# EAGLE board Motor-Board (EAGLE 7.3.0)
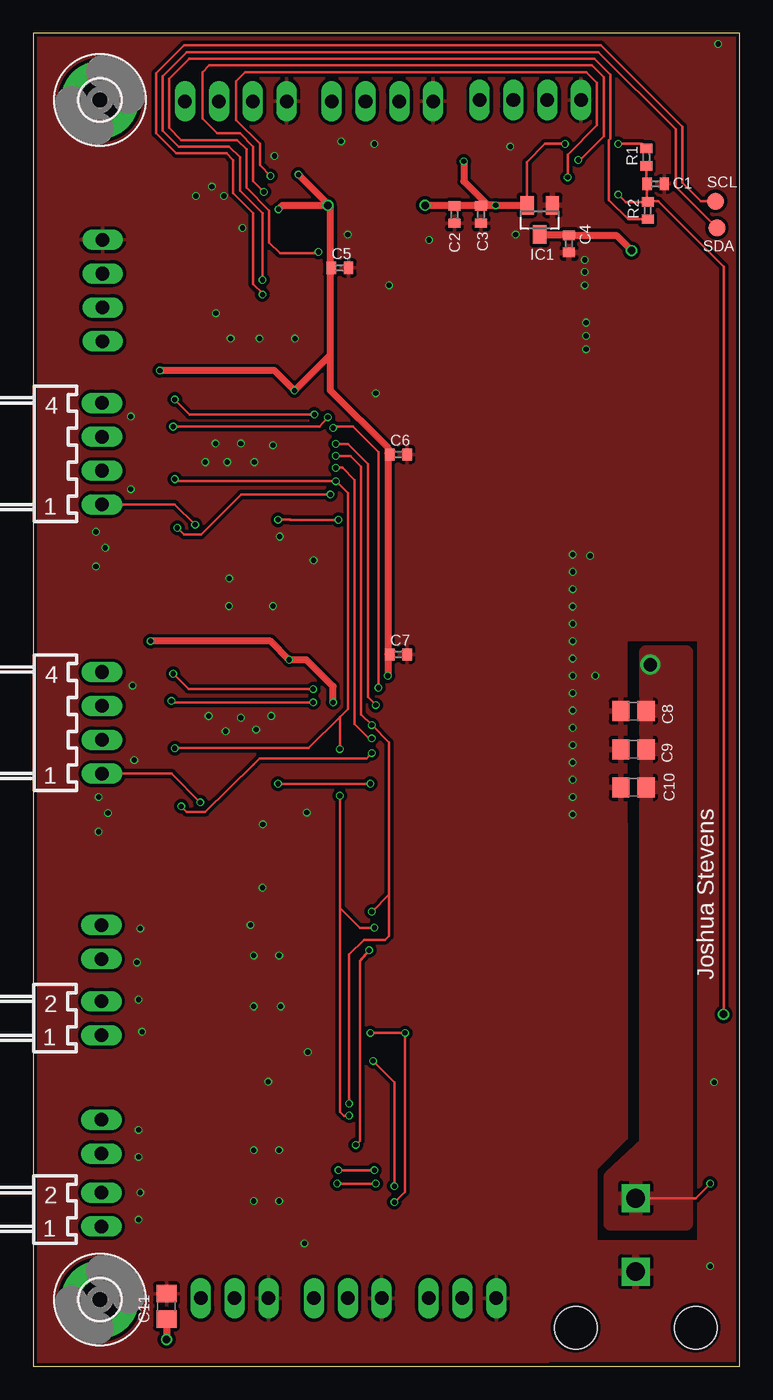
[diagram p0: board, top side]
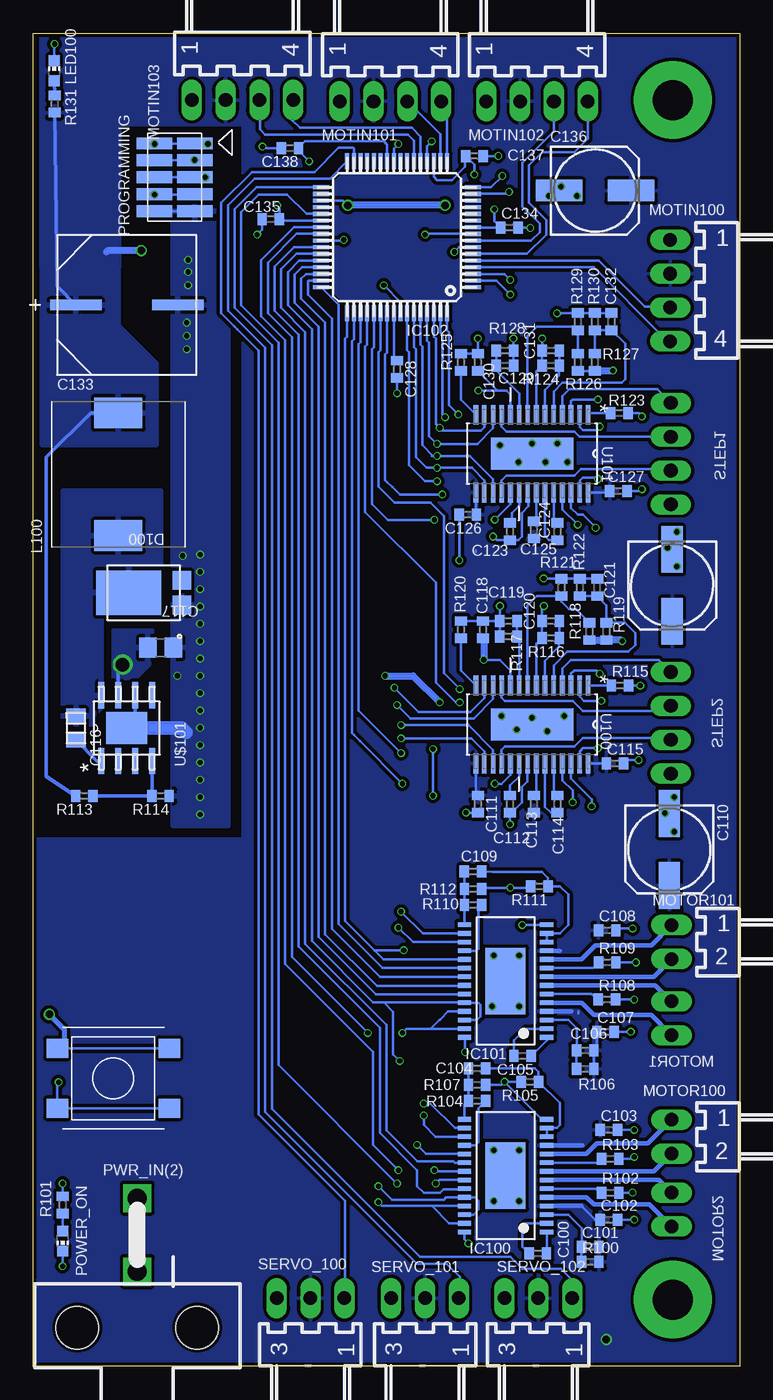
[diagram p1: board, bottom side, seen from below]

Size 53 x 100 mm. Coordinates in mm from the lower left corner, seen from the top.
Outline: 0,0 53,0 53,100 0,100 0,0
Copper layers (1*16): Top 0.035mm / dielectric 1.5mm / Bottom 0.035mm
Design rules "EagleRules-2-Layer-Shep": minimum track width 6mil, minimum drill 12mil, track to track 6mil, track to pad 6mil, pad to pad 6mil, via to via 6mil, smd to smd 0mil, copper to edge 10mil, drill to drill 10mil, minimum pad ring 2mil, minimum via ring 2mil, stop-mask expansion 2mil, vias tented up to drill 100mil, thermal gap 10mil
Net classes: 0 default: width 0.203 mm, drill 0.33 mm, clearance 0.254 mm; 1 +3v3: width 0.406 mm, drill 0.457 mm, clearance 0.254 mm; 2 VM: width 0.508 mm, drill 0.533 mm, clearance 0.254 mm

## Footprints (pad centres in the part's own frame; a part is rotated, then mirrored left to right if it is on the bottom)
C0402 = smd 0.7 x 0.9: 1 -0.65,0; 2 0.65,0
C0805 = smd 1.3 x 1.5: 1 -0.95,0; 2 0.95,0
153CLV-0605 = smd 3.5 x 1.6: + 2.7,0; - -2.7,0
0805 = smd 1.118 x 1.448: 1 -0.902,0; 2 0.902,0
SM_RADIAL_10AMM = smd 3.861 x 0.787: 1 -3.823,0; 2 3.823,0
POWERDI5 = smd 1.397 x 1.397: 1 -0.92,-2.857; 2 0.92,-2.857 | smd 3.353 x 4.851: 3 0,1.13
3,0-PAD = drill 3 pad 5.842: B3,0 0,0
SOT23 = smd 1 x 1.4: 1 -0.95,-1.1; 2 0.95,-1.1; 3 0,1.1
TSSOP-28 = smd 0.35 x 1: 1 -4.225,-3.087; 2 -3.575,-3.087; 3 -2.925,-3.087; 4 -2.275,-3.087; 5 -1.625,-3.087; 6 -0.975,-3.087; 7 -0.325,-3.087; 8 0.325,-3.087; 9 0.975,-3.087; 10 1.625,-3.087; 11 2.275,-3.087; 12 2.925,-3.087; 13 3.575,-3.087; 14 4.225,-3.087; 15 4.225,3.087; 16 3.575,3.087; 17 2.925,3.087; 18 2.275,3.087; 19 1.625,3.087; 20 0.975,3.087; 21 0.325,3.087; 22 -0.325,3.087; 23 -0.975,3.087; 24 -1.625,3.087; 25 -2.275,3.087; 26 -2.925,3.087; 27 -3.575,3.087; 28 -4.225,3.087 | smd 5 x 3: EXP 0,0
TQFP64-10X10 = smd 1.2 x 0.3: 1 -5.7,3.75; 2 -5.7,3.25; 3 -5.7,2.75; 4 -5.7,2.25; 5 -5.7,1.75; 6 -5.7,1.25; 7 -5.7,0.75; 8 -5.7,0.25; 9 -5.7,-0.25; 10 -5.7,-0.75; 11 -5.7,-1.25; 12 -5.7,-1.75; 13 -5.7,-2.25; 14 -5.7,-2.75; 15 -5.7,-3.25; 16 -5.7,-3.75; 33 5.7,-3.75; 34 5.7,-3.25; 35 5.7,-2.75; 36 5.7,-2.25; 37 5.7,-1.75; 38 5.7,-1.25; 39 5.7,-0.75; 40 5.7,-0.25; 41 5.7,0.25; 42 5.7,0.75; 43 5.7,1.25; 44 5.7,1.75; 45 5.7,2.25; 46 5.7,2.75; 47 5.7,3.25; 48 5.7,3.75 | smd 0.3 x 1.2: 17 -3.75,-5.7; 18 -3.25,-5.7; 19 -2.75,-5.7; 20 -2.25,-5.7; 21 -1.75,-5.7; 22 -1.25,-5.7; 23 -0.75,-5.7; 24 -0.25,-5.7; 25 0.25,-5.7; 26 0.75,-5.7; 27 1.25,-5.7; 28 1.75,-5.7; 29 2.25,-5.7; 30 2.75,-5.7; 31 3.25,-5.7; 32 3.75,-5.7; 49 3.75,5.7; 50 3.25,5.7; 51 2.75,5.7; 52 2.25,5.7; 53 1.75,5.7; 54 1.25,5.7; 55 0.75,5.7; 56 0.25,5.7; 57 -0.25,5.7; 58 -0.75,5.7; 59 -1.25,5.7; 60 -1.75,5.7; 61 -2.25,5.7; 62 -2.75,5.7; 63 -3.25,5.7; 64 -3.75,5.7
WE-HCC_1090 = smd 2.3 x 3.6: 1 -4.6,0; 2 4.6,0
CHIP-LED0603 = smd 0.8 x 0.8: A 0,-0.75; C 0,0.75
7395-04 = drill 1.016 long: 1 3.81,0; 2 1.27,0; 3 -1.27,0; 4 -3.81,0
7395-02 = drill 1.016 long: 1 1.27,0; 2 -1.27,0
MOTHER-BOARD-REV5_10-PIN-SMD = smd 0.889 x 2.667: 1 -2.54,1.524; 2 -2.54,-1.524; 3 -1.27,1.524; 4 -1.27,-1.524; 5 0,1.524; 6 0,-1.524; 7 1.27,1.524; 8 1.27,-1.524; 9 2.54,1.524; 10 2.54,-1.524
5569-2 = drill 1.4 square: 1 0,0; 2 0,5.5 | hole 3.2: 4.5,-4.2; -4.5,-4.2
R0402 = smd 0.7 x 0.9: 1 -0.65,0; 2 0.65,0
B1,27 = smd 1.27 x 1.27: TP 0,0
7395-03 = drill 1.016 long: 1 2.54,0; 2 0,0; 3 -2.54,0
SOP65P640X120-29N = smd 1.473 x 0.356: 1 -2.921,4.216; 2 -2.921,3.581; 3 -2.921,2.921; 4 -2.921,2.286; 5 -2.921,1.626; 6 -2.921,0.965; 7 -2.921,0.33; 8 -2.921,-0.33; 9 -2.921,-0.965; 10 -2.921,-1.626; 11 -2.921,-2.286; 12 -2.921,-2.921; 13 -2.921,-3.581; 14 -2.921,-4.216; 15 2.921,-4.216; 16 2.921,-3.581; 17 2.921,-2.921; 18 2.921,-2.286; 19 2.921,-1.626; 20 2.921,-0.965; 21 2.921,-0.33; 22 2.921,0.33; 23 2.921,0.965; 24 2.921,1.626; 25 2.921,2.286; 26 2.921,2.921; 27 2.921,3.581; 28 2.921,4.216 | smd 2.388 x 6.172: 29 0,0
MC32882_FINAL = smd 1.6 x 1.4: P$1 -4.2,-2.25; P$2 -4.2,2.25; P$3 4.2,2.25; P$4 4.2,-2.25
R-PDSO-G8 = smd 1.981 x 0.457: 1 -2.464,1.905; 2 -2.464,0.635; 3 -2.464,-0.635; 4 -2.464,-1.905; 5 2.464,-1.905; 6 2.464,-0.635; 7 2.464,0.635; 8 2.464,1.905 | smd 2.388 x 3.099: 9 0,0

## Placement (x,y rotation side)
C1  .1uF  [C0402]  46.7,88.7 0 top
C2  10uF  [C0402]  31.6,86.4 270 top
C3  0.1uF  [C0402]  33.6,86.4 270 top
C4  0.1uF  [C0402]  40.2,84.2 270 top
C5  0.1uF  [C0402]  23,82.4 0 top
C6  0.1uF  [C0402]  27.4,68.4 0 top
C7  0.1uF  [C0402]  27.4,53.4 0 top
C8  4.7uF  [C0805]  45.04,49.14 0 top
C9  4.7uF  [C0805]  45.04,46.28 0 top
C10  4.7uF  [C0805]  45.04,43.42 0 top
C11  10uF  [C0805]  10,4.5 90 top
C100  0.01uF  [C0402]  15.14,8.45 180 bottom
C101  0.1uF  [C0402]  11.2,8.96 0 bottom
C102  0.01uF  [C0402]  9.81,10.99 0 bottom
C103  0.01uF  [C0402]  9.81,17.72 0 bottom
C104  0.47uF  [C0402]  19.7,21.1 0 bottom
C105  0.01uF  [C0402]  16.28,23.28 180 bottom
C106  0.1uF  [C0402]  11.58,23.69 0 bottom
C107  0.01uF  [C0402]  10.06,25.09 0 bottom
C108  0.01uF  [C0402]  9.93,32.71 0 bottom
C109  0.47uF  [C0402]  20,35.8 0 bottom
C110  [153CLV-0605]  5.27,38.76 270 bottom
C111  0.1uF  [C0402]  19.64,42.17 270 bottom
C112  0.22uF  [C0402]  17.22,42.17 270 bottom
C113  0.22uF  [C0402]  15.45,42.17 90 bottom
C114  0.22uF  [C0402]  13.67,42.17 90 bottom
C115  0.1uF  [C0402]  9.35,45.22 0 bottom
C116  10nF  [0805]  49.8,47.87 90 bottom
C117  4.7uF  [C0805]  43.45,53.9 180 bottom
C118  0.1uF  [C0402]  19.25,55.26 90 bottom
C119  1nF  [C0402]  17.35,55.89 180 bottom
C120  1nF  [C0402]  14.18,55.89 180 bottom
C121  .1uF  [C0402]  10.69,58.43 90 bottom
C122  [153CLV-0605]  5.06,58.58 270 bottom
C123  0.22uF  [C0402]  17.22,62.62 270 bottom
C124  0.22uF  [C0402]  13.67,62.62 90 bottom
C125  0.22uF  [C0402]  15.45,62.75 90 bottom
C126  0.1uF  [C0402]  20.4,63.89 180 bottom
C127  0.1uF  [C0402]  9.1,65.67 0 bottom
C128  10uF  [C0402]  25.7,74.8 270 bottom
C129  1nF  [C0402]  17.6,75.07 0 bottom
C130  0.1uF  [C0402]  19.64,75.32 90 bottom
C131  1nF  [C0402]  14.18,76.21 180 bottom
C132  0.1uF  [C0402]  9.6,78.37 90 bottom
C133  330uF  [SM_RADIAL_10AMM]  45.99,79.62 0 bottom
C134  0.1uF  [C0402]  17.27,85.43 0 bottom
C135  0.1uF  [C0402]  35.18,86.07 180 bottom
C136  [153CLV-0605]  10.84,88.2 0 bottom
C137  0.1uF  [C0402]  19.9,90.8 0 bottom
C138  .1uF  [C0402]  33.75,91.4 180 bottom
D100  PDS760-13  [POWERDI5]  44.72,58.03 90 bottom
H1  MOUNT-PAD-ROUND3.0  [3,0-PAD]  5,95 0 top
H2  MOUNT-PAD-ROUND3.0  [3,0-PAD]  5,5 0 top
IC1  MCP1703CB  [SOT23]  38,86 180 top
IC100  DRV8814  [TSSOP-28]  17.55,14.29 90 bottom
IC101  DRV8814  [TSSOP-28]  17.55,28.9 90 bottom
IC102  PIC24FJ256GB106  [TQFP64-10X10]  25.7,84.7 180 bottom
L100  [WE-HCC_1090]  46.62,66.92 90 bottom
LED100  [CHIP-LED0603]  51.43,97.19 0 bottom
MOTIN100  22-05-7048-04  [7395-04]  5.2,80.7 90 bottom
MOTIN101  22-05-7048-04  [7395-04]  26.2,94.9 180 bottom
MOTIN102  22-05-7048-04  [7395-04]  15.2,94.9 180 bottom
MOTIN103  22-05-7048-04  [7395-04]  37.3,95 180 bottom
MOTOR1  22-05-7028-02  [7395-02]  5.11,26.11 270 top
MOTOR2  22-05-7028-02  [7395-02]  5.11,11.75 270 top
MOTOR100  22-05-7028-02  [7395-02]  5.11,17.21 90 bottom
MOTOR101  22-05-7028-02  [7395-02]  5.11,31.82 90 bottom
POWER_ON  [CHIP-LED0603]  50.8,9.4 180 bottom
PROGRAMMING  Jtag  [MOTHER-BOARD-REV5_10-PIN-SMD]  42.4,89.2 270 bottom
PWR_IN(2)  [5569-2]  45.2,7.1 0 bottom
R1  10k  [R0402]  46,90.7 90 top
R2  100  [R0402]  46.1,86.7 90 top
R100  1M  [R0402]  11.2,7.82 0 bottom
R101  10k  [R0402]  50.8,12.1 90 bottom
R102  0.2  [R0402]  9.71,13.02 0 bottom
R103  0.2  [R0402]  9.71,15.56 0 bottom
R104  10k  [R0402]  19.7,19.9 180 bottom
R105  30k  [R0402]  15.73,21.34 180 bottom
R106  1M  [R0402]  11.58,22.3 0 bottom
R107  10k  [R0402]  19.69,22.34 180 bottom
R108  0.2  [R0402]  9.96,27.5 0 bottom
R109  0.2  [R0402]  9.93,30.3 0 bottom
R110  10k  [R0402]  20,34.6 180 bottom
R111  30k  [R0402]  15.01,36.01 180 bottom
R112  10k  [R0402]  20,37.11 180 bottom
R113  10k  [R0402]  49.16,42.79 180 bottom
R114  [R0402]  43.45,42.79 180 bottom
R115  0.1  [R0402]  8.97,51.06 0 bottom
R116  47k  [R0402]  14.18,54.62 180 bottom
R117  47k  [R0402]  17.35,54.75 180 bottom
R118  10k  [R0402]  11.25,55.13 90 bottom
R119  10k  [R0402]  9.98,55.13 90 bottom
R120  0.1  [R0402]  20.91,55.26 90 bottom
R121  10k  [R0402]  13.35,58.43 90 bottom
R122  10k  [R0402]  11.98,58.43 90 bottom
R123  0.1  [R0402]  9.02,71.51 0 bottom
R124  47k  [R0402]  14.18,75.07 180 bottom
R125  0.1  [R0402]  20.91,75.32 90 bottom
R126  10k  [R0402]  12.14,75.32 90 bottom
R127  10k  [R0402]  10.87,75.32 90 bottom
R128  47k  [R0402]  17.6,76.21 0 bottom
R129  10k  [R0402]  12.14,78.37 90 bottom
R130  10k  [R0402]  10.87,78.37 90 bottom
R131  10k  [R0402]  51.41,94.7 270 bottom
SCL  PTR1B1,27  [B1,27]  51.2,87.4 0 top
SDA  PTR1B1,27  [B1,27]  51.3,85.4 0 top
SERVO_100  [7395-03]  32.2,5.1 0 bottom
SERVO_101  [7395-03]  23.6,5.1 0 bottom
SERVO_102  [7395-03]  15.1,5.1 0 bottom
STEP1  22-05-7048-04  [7395-04]  5.16,68.46 270 top
STEP2  22-05-7048-04  [7395-04]  5.16,48.27 270 top
U100  DRV8811PWP  [SOP65P640X120-29N]  15.57,48.14 270 bottom
U101  DRV8811PWP  [SOP65P640X120-29N]  15.57,68.46 270 bottom
U$100  Switch3  [MC32882_FINAL]  47,21.6 0 bottom
U$101  TPS5450DDAR  [R-PDSO-G8]  45.99,47.87 90 bottom

## Library data of the parts
C1-C11 C100-C115 C117-C132 C134-C138 R1 R2 R100-R131 = rcl
C116 = 5v; CAP: 1.0E-8; ESR: 1.739; IRMS: 0.411; MANUFACTURER_NAME: Kemet; MANUFACTURER_PART_NUMBER: C0805C103K5RACTU; VDC: 50.0; VENDOR: Kemet
C133 = 5v; CAP: 3.3E-4; DATASHEETURL: http://www.edc.sanyo.com/english/pdf/oscon/E32.pdf; ESR: 0.025; IRMS: 3.7; MANUFACTURER_NAME: Panasonic; MANUFACTURER_PART_NUMBER: 10SVP330MX; VDC: 10.0; VENDOR: Panasonic
D100 = 5v; DATASHEETURL: www.diodes.com/datasheets/ds30477.pdf; IO: 7.0; MANUFACTURER_NAME: Diodes Inc.; MANUFACTURER_PART_NUMBER: PDS760-13; VENDOR: Diodes Inc.; VFATIO: 0.56; VRRM: 60.0
H1 H2 = holes
IC1 = linear
IC100 IC101 = Motor-Board
IC102 = microchip; MPN: PIC24FJ256GB106-I/PT; OC_FARNELL: 1576868; OC_NEWARK: 54M5129
L100 = WE-HCC; MPN: 7443331000; OC_FARNELL: 1848254; OC_NEWARK: 13T9771; PACKAGE: 1090; SUPPLIER: Wuerth Elektronik
LED100 POWER_ON = led
MOTIN100-MOTIN103 STEP1 STEP2 = Son_of_Dark_Power; OC_FARNELL: unknown; OC_NEWARK: unknown
MOTOR1 MOTOR2 MOTOR100 MOTOR101 = Son_of_Dark_Power; OC_FARNELL: 9731601; OC_NEWARK: unknown
PROGRAMMING = Mother-Board-rev5
PWR_IN(2) = Son_of_Dark_Powersch
SCL SDA = testpad
SERVO_100-SERVO_102 = con-molex; OC_FARNELL: unknown; OC_NEWARK: unknown
U100 U101 = Texas Instruments_By_element14_Batch_1; MPN: DRV8811PWP; OC_FARNELL: 1754829; OC_NEWARK: 24R9116; PACKAGE: HTSSOP-28; SUPPLIER: Texas Instruments
U$100 = Parts4Class
U$101 = 5v; DATASHEETURL: http://www.ti.com/product/tps5450; FREQUENCY: 500000.0; IMAX: 5.0; MANUFACTURER_NAME: Texas Instruments; MANUFACTURER_PART_NUMBER: TPS5450DDA; MKTG_PACKAGE: TPS5450; NSID: TPS5450DDAR; PACKAGE: TPS5450; VENDOR: Texas Instruments

## Nets
+3V3 [+3v3]: C2.1 C3.1 C5.1 C6.1 C7.1 C118.1 C130.1 C134.1 C135.1 C137.1 C138.1 IC1.2 IC102.10 IC102.19 IC102.26 IC102.35 IC102.38 PROGRAMMING.1 PROGRAMMING.2 R1.2 R118.1 R119.1 R126.1 R127.1 U100.10 U101.10
+7V [VM]: C4.1 C11.1 C101.2 C102.1 C103.1 C106.2 C107.1 C108.1 C110.+ C111.1 C113.1 C115.1 C122.+ C125.1 C126.1 C127.1 C133.1 C136.+ IC1.3 IC100.4 IC100.11 IC101.4 IC101.11 L100.2 MOTIN100.2 MOTIN101.2 MOTIN102.2 MOTIN103.2 R100.2 R106.2 R113.2 R131.2 SERVO_100.2 SERVO_101.2 SERVO_102.2 U100.15 U100.28 U101.15 U101.28
BOOT_VM: C116.1 U$101.1
CHANNEL_A_1: IC102.4 MOTIN100.4
CHANNEL_A_2: IC102.22 MOTIN103.3
CHANNEL_A_3: IC102.18 MOTIN101.3
CHANNEL_A_4: IC102.8 MOTIN102.3
CHANNEL_B_1: IC102.5 MOTIN100.3
CHANNEL_B_2: IC102.21 MOTIN103.4
CHANNEL_B_3: IC102.17 MOTIN101.4
CHANNEL_B_4: IC102.6 MOTIN102.4
GND: C1.2 C2.2 C3.2 C4.2 C5.2 C6.2 C7.2 C8.1 C9.1 C10.1 C11.2 C102.2 C103.2 C104.2 C107.2 C108.2 C109.2 C110.- C111.2 C112.2 C115.2 C117.1 C118.2 C119.2 C120.2 C121.2 C122.- C123.2 C126.2 C127.2 C128.2 C129.2 C130.2 C131.2 C132.2 C133.2 C134.2 C135.2 C136.- C137.2 C138.2 D100.1 IC1.1 IC100.14 IC100.28 IC100.EXP IC101.14 IC101.28 IC101.EXP IC102.9 IC102.20 IC102.25 IC102.41 IC102.57 LED100.C MOTIN100.1 MOTIN101.1 MOTIN102.1 MOTIN103.1 POWER_ON.C PROGRAMMING.9 PROGRAMMING.10 PWR_IN(2).1 R102.2 R103.2 R105.2 R108.2 R109.2 R111.2 R114.1 R115.2 R116.2 R117.2 R120.2 R121.2 R122.2 R123.2 R124.2 R125.2 R128.2 R129.2 R130.2 SERVO_100.3 SERVO_101.3 SERVO_102.3 U100.7 U100.21 U100.29 U101.7 U101.21 U101.29 U$100.P$1 U$100.P$4 U$101.6 U$101.9
M1-AENBL: IC101.21 IC102.47
M1-APHASE: IC101.20 IC102.48
M1-BENBL: IC101.22 IC102.46
M1-BHPASE: IC101.23 IC102.45
M1-MAOUT1: IC101.5 MOTOR1.1
M1-MAOUT2: IC101.7 MOTOR1.2
M1-MBOUT1: IC101.10 MOTOR101.1
M1-MBOUT2: IC101.8 MOTOR101.2
M2-AENBL: IC100.21 IC102.39
M2-APHASE: IC100.20 IC102.43
M2-BENBL: IC100.22 IC102.37
M2-BHPASE: IC100.23 IC102.42
M2-MAOUT1: IC100.5 MOTOR2.1
M2-MAOUT2: IC100.7 MOTOR2.2
M2-MBOUT1: IC100.10 MOTOR100.1
M2-MBOUT2: IC100.8 MOTOR100.2
M-DECAY: IC100.19 IC101.19 IC102.49
M-I0: IC100.24 IC100.26 IC101.24 IC101.26 IC102.44
M-I1: IC100.25 IC100.27 IC101.25 IC101.27 IC102.40
M-NSLEEP: IC100.17 IC101.17 IC102.58 U100.27 U101.27
M-RESET: IC100.16 IC101.16 IC102.60 U100.17 U101.17
M_MCLR: C1.1 PROGRAMMING.7 PROGRAMMING.8 R1.1 R2.2 U$100.P$2 U$100.P$3
M_MCLR': IC102.7 R2.1
M_PGC1: IC102.15 PROGRAMMING.3 PROGRAMMING.4
M_PGD1: IC102.16 PROGRAMMING.5 PROGRAMMING.6
N$1: C105.2 IC101.2
N$2: C105.1 IC101.1
N$3: C106.1 IC101.3 R106.1
N$4: IC101.6 R108.1
N$5: C100.2 IC100.2
N$6: C100.1 IC100.1
N$7: C101.1 IC100.3 R100.1
N$8: IC100.6 R102.1
N$9: IC100.9 R103.1
N$10: IC101.9 R109.1
N$11: IC100.12 IC100.13 R105.1 R107.1
N$12: IC101.12 IC101.13 R111.1 R112.1
N$13: R125.1 U101.14
N$14: R123.1 U101.1
N$15: R120.1 U100.14
N$16: R115.1 U100.1
N$17: C120.1 R116.1 U100.6
N$18: C131.1 R124.1 U101.6
N$19: C129.1 R128.1 U101.9
N$20: C119.1 R117.1 U100.9
N$21: C121.1 R119.2 R122.1 U100.5
N$22: R118.2 R121.1 U100.8
N$23: C114.1 U100.23
N$24: C114.2 U100.24
N$25: LED100.A R131.1
N$26: C132.1 R127.2 R130.1 U101.5
N$27: C112.1 U100.20
N$28: C113.2 U100.22
N$29 [+3v3]: C109.1 IC101.15 R110.2 R112.2
N$30: R126.2 R129.1 U101.8
N$31: IC101.18 R110.1
N$32: C124.1 U101.23
N$33: C124.2 U101.24
N$34: C123.1 U101.20
N$35: IC100.18 R104.1
N$36: C125.2 U101.22
N$37 [+3v3]: C104.1 IC100.15 R104.2 R107.2
N$38: POWER_ON.A R101.1
N$39: C128.1 IC102.56
OC1: IC102.33 SERVO_102.1
OC2: IC102.32 SERVO_101.1
OC3: IC102.31 SERVO_100.1
PH_VM: C116.2 D100.3 L100.1 U$101.8
S1-AOUT1: STEP1.4 U101.4
S1-AOUT2: STEP1.1 U101.25
S1-BOUT1: STEP1.3 U101.11
S1-BOUT2: STEP1.2 U101.18
S1-DIR: IC102.64 U101.3
S1-ENABLEN: IC102.55 U101.26
S1-HOME: IC102.63 U101.2
S1-STEP: IC102.53 U101.19
S2-AOUT1: STEP2.4 U100.4
S2-AOUT2: STEP2.1 U100.25
S2-BOUT1: STEP2.3 U100.11
S2-BOUT2: STEP2.2 U100.18
S2-DIR: IC102.54 U100.3
S2-ENABLEN: IC102.51 U100.26
S2-HOME: IC102.52 U100.2
S2-STEP: IC102.50 U100.19
S-SRN: IC102.59 U100.16 U101.16
SCL: IC102.2 SCL.TP
SDA: IC102.3 SDA.TP
USM0: IC102.62 U100.13 U101.13
USM1: IC102.61 U100.12 U101.12
VCC: C8.2 C9.2 C10.2 C117.2 PWR_IN(2).2 R101.2 U$101.7
VSNS_VM: R113.1 R114.2 U$101.4

## Tracks (layer width: path | path; a pad name or v marks a point on that pad's centre or on a via)
+3V3  (via drill 0.38, 0.56)
  Top 0.203: R1.2 45.65,91.7 v43.9,91.7 | IC1.2 37.05,90.35 38.4,91.7 v39.9,91.7 | C5.1 22.35,82.45 22.3,82.5 | C6.1 26.7,68.4 26.6,68.5 | C7.1 26.6,53.4 | C2.1 31.05,87.05 31,87.1
  Top 0.508: v34.7,87.1 34.1,87.1 32.3,88.9 v32.3,90.4 | v18.4,86.8 18.7,87.1 v22.1,87.1 | v19.9,89.4 22.2,87.1 v22.1,87.1 | v9.5,74.7 18.1,74.7 v19.6,73.2 22.3,75.9 | v8.8,54.4 17.8,54.4 v19.2,53 20.5,53 22.5,51 v22.5,49.8 | v26.6,51.8 26.6,53.4 26.6,68.5 26.6,68.9 22.3,73.2 22.3,75.9 | v29.4,87.1 31,87.1 33.65,87.1 | 33.65,87.1 v34.7,87.1 | 22.3,75.9 22.3,82.5 22.3,86.9 v22.1,87.1 | v34.7,87.1 34.75,87.05 34.8,87.1 IC1.2 | C3.1 33.65,87.1
  Bottom 0.203: 10,54.49 R119.1 | U101.10 17.2,72.9 17.5,73.2 18.2,73.2 | R126.1 R127.1 | IC102.10 19.98,85.43 C134.1 18.4,85.91 v18.4,86.8 | IC102.26 26.45,91.65 26.7,91.9 32.59,91.9 C138.1 33.1,91.2 v32.3,90.4 | IC102.38 34.41,85.95 C135.1 34.53,86.93 v34.7,87.1 | IC102.19 22.95,89.25 22.7,89 21.6,89 20.6,90 20.6,90.75 C137.1 19.9,90.15 v19.9,89.4 | IC102.35 29.75,87.45 v29.4,87.1 | 18.2,73.2 v19.6,73.2 | C130.1 18.2,73.23 18.2,73.2 | U100.10 17.2,52.2 18,53 v19.2,53 | v39.9,91.7 40.84,91.7 PROGRAMMING.1 40.92,91.7 v43.9,91.7 43.9,91.72 PROGRAMMING.2
  Bottom 0.508: R118.1 R119.1 8.88,54.48 v8.8,54.4 | v9.5,74.7 9.53,74.67 R127.1 | C118.1 19.2,54.55 v19.2,53 | v26.6,51.8 24.5,51.8 v22.5,49.8 | v22.1,87.1 v29.4,87.1
+7V  (via drill 0.56)
  Top 0.508: C11.1 v10,2 | v44.9,83.7 43.75,84.85 C4.1 40.15,84.9 IC1.3
  Bottom 0.203: U100.15 19.79,42.98 C111.1 | U100.28 C115.1 | C107.1 10.71,23.92 C106.2 R106.2 | 11.86,12.02 10.84,10.99 C102.1 | 13.5,31.17 13.49,31.18 | 12.09,26.61 12.09,26.47 | 12.61,26.62 12.6,26.61 | U101.15 19.76,65.52 19.76,63.91 C126.1 | U101.28 10.13,65.54 C127.1 | 19.76,61.21 19.76,61.1
  Bottom 0.254: R113.2 52.02,44.23 52.02,68.19 48.69,71.52 L100.2 | C133.1 51.22,81.03 R131.2
  Bottom 0.356: IC100.11 11.81,16.57 | IC100.4 11.86,12.02 | IC101.11 13.5,31.17 | IC101.4 12.61,26.62
  Bottom 0.508: v44.9,83.7 47.4,83.7 47.5,83.6
  pour Bottom: 52.34,69.14 43.77,69.14 43.77,75.17 46.62,78.03 46.62,82.48 52.34,82.48
  pour Bottom: 46.5,82.5 46.5,93.1 37.3,93.1 37.3,39.6 53,39.6 53,0.2 0.1,0.2 0.1,99.8 52.5,99.8 52.5,82.5
BOOT_VM
  Bottom 0.254: U$101.1 48.24,45.41 C116.1
CHANNEL_A_1
  Bottom 0.203: IC102.4 10.95,82.45 5.8,77.3 5.61,77.3 MOTIN100.4
CHANNEL_A_2
  Bottom 0.203: IC102.22 24.45,91.95 24.9,92.4 35.6,92.4 36,92.8 36,94.97 MOTIN103.3
CHANNEL_A_3
  Bottom 0.203: IC102.18 22.45,92.42 MOTIN101.3
CHANNEL_A_4
  Bottom 0.203: MOTIN102.3 13.93,92.67 16.3,90.3 16.3,87 15,85.7 15,85.1 15.65,84.45 IC102.8 19.95,84.4
CHANNEL_B_1
  Bottom 0.203: IC102.5 10.55,82.95 7.1,79.5 5.27,79.5 MOTIN100.3
CHANNEL_B_2
  Bottom 0.203: IC102.21 23.95,92.25 24.6,92.9 33,92.9 33.6,93.5 33.6,94.89 MOTIN103.4
CHANNEL_B_3
  Bottom 0.203: IC102.17 21.95,94.46 MOTIN101.4
CHANNEL_B_4
  Bottom 0.203: MOTIN102.4 11.39,92.11 12.4,91.1 14.8,91.1 15.8,90.1 15.8,87.3 14.5,86 14.5,84.9 15.95,83.45 IC102.6
GND  (via drill 0.38)
  Bottom 0.203: U100.29 v15.57,48.65 | U100.21 15.9,43.88 16.33,43.44 16.33,42.3 17.11,41.52 C112.2 v17.22,40.65 | R115.2 v7.44,51.06 | C111.2 20.51,41.52 v20.52,41.54 | U100.7 15.24,54.2 R116.2 C120.2 14.82,56.89 v14.68,57.03 | R117.2 C119.2 | C119.2 18,57.02 v17.98,57.03 | C108.2 9.16,32.84 v8.03,32.84 | R109.2 v7.77,30.3 | R108.2 v7.9,27.5 | C107.2 v8.15,25.09 | IC101.EXP 18.44,29.79 v18.44,30.8 | IC101.28 20.6,24.63 v20.6,23.57 | IC100.EXP 17.55,15.31 v18.44,16.2 | v17.63,21.34 17.62,21.32 16.36,21.32 R105.2 | C103.2 v7.9,17.72 | R103.2 8.03,15.56 v7.9,15.69 | R102.2 v8.03,13.02 | C102.2 v7.9,10.99 | U101.7 15.24,74.65 R124.2 C131.2 14.81,76.22 v14.81,77.1 | R123.2 7.57,71.51 v7.32,71.26 | C127.2 7.44,65.67 v7.32,65.8 | U101.21 15.83,65.47 15.83,64.53 16.33,64.02 16.33,62.24 16.6,61.97 C123.2 18.22,61.97 v18.49,62.24 | U101.29 v15.57,69.22 | C129.2 R128.2 16.95,77.08 v16.97,77.1 | v19.64,77.1 C130.2 R125.2 | C115.2 8.45,45.48 v7.57,45.48 | C121.2 R122.2 R121.2 14.68,59.08 v14.7,59.1 | C126.2 21.03,63.88 v21.03,60.46 | R120.2 C118.2 18.02,55.91 C119.2 | C132.2 R130.2 R129.2 12.16,79 v13.7,79 | IC100.28 20.64,9.51 v20.35,9.21 | U$100.P$4 U$100.P$1 51.2,21.2 v51.1,21.3 | v13.4,88.5 13.3,88.44 C136.- | C122.- 5.28,61.28 v5.4,61.4 | v5.6,41.5 5.3,41.5 C110.- | LED100.C 51.43,99.17 v51.4,99.2 | C104.2 17.87,21.1 v17.63,21.34 | IC100.14 14.82,18.52 v17.63,21.34 | IC101.14 16.28,33.12 v16.3,33.1 | 15.7,35.97 R111.2 15.87,35.8 15.97,35.9 v17.2,35.9 19.25,35.9 C109.2 | POWER_ON.C v50.8,7.5 | C138.2 35.7,91.4 v35.8,91.5 | C135.2 35.83,85.27 v36.2,84.9 | C137.2 v18.1,90.8 | IC102.20 23.45,91.55 v23.1,91.9 | IC102.25 25.95,91.35 v25.6,91.7
  Bottom 0.203: C128.2 v25.7,73 | PROGRAMMING.9 PROGRAMMING.10 | IC102.57 25.45,79.85 v26.7,81.1 | IC102.41 29.75,84.45 v29.7,84.5 | IC102.9 23.55,84.95 v23.6,84.9 | C134.2 15.73,85.43 v15.7,85.4
  Bottom 0.254: U$101.6 45.35,47.87
  Bottom 1.016: U$101.9 45.35,47.87 41.86,47.87 41.55,47.55
  other vias: 13.16,48.78 14.43,47.63 16.71,47.76 17.86,48.78 16.54,30.8 18.57,26.99 16.54,26.99 16.54,16.2 18.44,12.39 16.54,12.39 12.9,67.83 13.67,69.22 14.56,67.83 16.59,67.83 17.98,69.1 12.2,87.8 14.3,87.8 4.7,62.6 4.7,60 4.9,42.7 4.9,40.1 41.38,81.1 41.38,82.1 41.38,83 41.48,78.3 41.48,77.3 41.48,76.3 41.78,60.8 40.48,60.9 40.48,59.6 40.48,58.3 40.48,57 40.48,55.7 40.48,54.4 40.48,53.1 40.48,51.8 42.19,51.8 40.48,50.5 40.48,49.2 40.48,47.9 40.48,46.6 40.48,45.3 40.48,44 40.48,42.7 40.48,41.4
  pour Top: 44.4,40.57 44.4,92.32 38.37,92.32 38.37,40.57
  pour Bottom: 42.5,40.57 42.5,92.32 38.37,92.32 38.37,40.57
  pour Top (isolate 0.254): 52.7,8.2 52.7,9.2 42.1,9.2 42.1,14.9 44.4,17.2 44.4,40.6 38.4,40.6 38.4,38.4 38.4,0.6 40.1,0.6 52.7,0.6
  pour Top (isolate 0.254): 53,10.2 53,9 50.8,9 49.9,9 49.9,11 49.9,54.5 44.4,54.5 38.6,54.5 38.6,-0.1 0,-0.1 0,100 53,100
M1-AENBL
  Bottom 0.203: IC102.47 32.35,81.45 32.4,81.4 32.4,80.4 30.6,78.6 30.6,32.8 27,29.2 20.66,29.2 IC101.21
M1-APHASE
  Bottom 0.203: 20.68,29.91 IC101.20 20.67,29.9 26.8,29.9 30.1,33.2 30.1,79.65 IC102.48
M1-BENBL
  Bottom 0.203: IC101.22 20.7,28.52 27.22,28.52 31.1,32.4 31.1,78.3 32.9,80.1 32.9,81.6 32.55,81.95 IC102.46
M1-BHPASE
  Bottom 0.203: IC102.45 32.85,82.45 33.4,81.9 33.4,79.8 31.6,78 31.6,32.2 27.3,27.9 20.66,27.9 IC101.23
M1-MAOUT1
  Bottom 0.356: IC101.5 11.84,27.27 10.92,26.36 6.63,26.36 MOTOR1.1
M1-MAOUT2
  Bottom 0.356: IC101.7 6.31,28.57 MOTOR1.2
M1-MBOUT1
  Bottom 0.356: IC101.10 11.86,30.52 10.82,31.57 6.63,31.57 MOTOR101.1
M1-MBOUT2
  Bottom 0.356: IC101.8 6.43,29.22 MOTOR101.2
M2-AENBL  (via drill 0.38)
  Top 0.203: v25.6,14.7 v22.9,14.7
  Bottom 0.203: 20.7,14.68 IC100.21 22.82,14.62 v22.9,14.7 | IC102.39 33.45,85.45 35.9,83 35.9,78.8 34.1,77 34.1,30.2 27.5,23.6 27.5,16.6 v25.6,14.7
M2-APHASE
  Bottom 0.203: 20.68,15.31 IC100.20 | IC102.43 33.25,83.45 34.4,82.3 34.4,79.4 32.6,77.6 32.6,31.7 26.5,25.6 26.5,17.7 24.17,15.37 21.47,15.37 21.37,15.27 IC100.20 | 20.67,15.3 IC100.20
M2-BENBL  (via drill 0.38)
  Top 0.203: v25.7,13.7 v22.8,13.7
  Bottom 0.203: 20.7,13.91 IC100.22 22.53,13.97 v22.8,13.7 | v25.7,13.7 34.6,22.6 34.6,76.8 37.4,79.6 37.4,86.6 36.1,87.9 33.95,87.9 32.5,86.45 IC102.37
M2-BHPASE
  Bottom 0.203: IC100.23 20.68,13.28 22.22,13.28 22.5,13 23.7,13 24.2,13.5 24.2,14.7 27,17.5 27,25.4 33.1,31.5 33.1,77.4 34.9,79.2 34.9,82.5 33.45,83.95 IC102.42
M2-MAOUT1
  Bottom 0.356: IC100.5 11.48,12.67 10.95,12.13 6.76,12.13 MOTOR2.1
M2-MAOUT2
  Bottom 0.356: IC100.7 6.05,13.97 MOTOR2.2
M2-MBOUT1
  Bottom 0.356: IC100.10 11.48,15.92 10.7,16.71 6.88,16.71 MOTOR100.1
M2-MBOUT2
  Bottom 0.356: IC100.8 6.43,14.62 MOTOR100.2
M-DECAY  (via drill 0.38)
  Top 0.203: v24.2,16.6 24.5,16.9 24.5,30.4 v25.2,31.2
  Bottom 0.203: IC100.19 20.67,15.95 23.55,15.95 v24.2,16.6 | 27.4,31.2 29.6,33.4 29.6,77.1 29.45,77.25 IC102.49 | 27.4,31.2 26.72,30.52 IC101.19 | v25.2,31.2 27.4,31.2
M-I0  (via drill 0.38)
  Top 0.203: v27.1,13.5 27.1,21.3 v25.5,22.9
  Bottom 0.203: IC101.26 19.71,25.98 19.46,26.23 19.46,27.12 19.61,27.27 IC101.24 20.67,27.3 26.7,27.3 | IC100.26 19.97,11.37 19.59,11.75 19.59,12.39 19.86,12.67 IC100.24 22.03,12.67 22.2,12.5 26.1,12.5 v27.1,13.5 | IC102.44 33.05,82.95 33.9,82.1 33.9,79.6 32.1,77.8 32.1,31.9 27.5,27.3 26.7,27.3 | v25.5,22.9 26,23.4 26,26.6 26.7,27.3
M-I1  (via drill 0.38)
  Top 0.203: v25.3,25 v27.9,25 27.9,13.1 v27.1,12.3
  Bottom 0.203: 20.65,12.01 IC100.25 23.1,12.02 | IC102.40 33.25,84.95 35.4,82.8 35.4,79 33.6,77.2 33.6,30.7 v27.9,25 | v25.3,25 24.98,25.32 23.2,25.32 | 23.2,25.32 IC101.27 | IC101.25 21.88,26.62 22.5,26 22.52,26 23.2,25.32 | 23.1,12.02 26.82,12.02 v27.1,12.3 | IC100.27 21.8,10.72 23.1,12.02
M-NSLEEP  (via drill 0.38)
  Top 0.203: v10.62,66.56 10.78,66.4 v22.7,66.4 23.6,65.5 23.6,49.3 23,48.7 | v10.62,46.37 20.66,46.37 23,48.7 | v25.6,32.9 24.5,32.9 23,34.4 | 23,34.4 v23,42.8 | v23.7,18.8 23.3,18.8 23,19.1 23,34.4 | v23,46.3 23,48.7
  Bottom 0.203: IC100.17 22.82,17.22 23.7,18.1 v23.7,18.8 | U101.27 11.99,66.46 11.76,66.69 10.75,66.69 v10.62,66.56 | U100.27 11.99,46.14 11.76,46.37 v10.62,46.37 | v22.7,66.4 23.6,66.4 24.8,67.6 24.8,76.1 24.95,76.25 IC102.58 | IC101.17 24.52,31.82 v25.6,32.9 | v23,42.8 v23,46.3
M-RESET  (via drill 0.38)
  Top 0.203: v22.7,68.3 23.8,68.3 24.6,67.5 24.6,48.9 v25.4,48.1 26.7,46.8 26.7,35.4 | v25.4,34.1 26.7,35.4 | v23.7,19.7 23.7,30.9 24.8,32 26.4,32 26.7,32.3 26.7,35.4
  Bottom 0.203: U100.17 18.49,46.24 20.36,48.1 v25.4,48.1 | 20.66,17.85 IC100.16 21.37,17.87 23.2,19.7 v23.7,19.7 | U101.17 18.49,66.56 20.23,68.3 v22.7,68.3 | v22.7,68.3 23.1,68.3 | IC101.16 23.77,32.47 v25.4,34.1 | IC102.60 23.95,76.65 23.8,76.5 23.8,69.1 23,68.3 v22.7,68.3
M_MCLR  (via drill 0.38, 0.56)
  Top 0.203: v43.9,87.9 44.45,87.35 R2.2 | R2.2 46.05,87.4 C1.1 46,88.75 R1.1 | v51.8,26.4 51.8,82.5 46.9,87.4 46.15,87.4 R2.2
  Bottom 0.203: U$100.P$3 U$100.P$2 50.65,24.4 | PROGRAMMING.7 40.91,87.9 v43.9,87.9 PROGRAMMING.8
  Bottom 0.381: 50.65,24.4 50.65,25.25 v51.8,26.4
M_MCLR'  (via drill 0.38)
  Top 0.203: R2.1 44.65,86.05 43.2,87.5 43.2,92 43.3,92.1 43.3,96.9 42.1,98.1 11.7,98.1 10.2,96.6 10.2,92.9 11.1,92 15.3,92 16,91.3 16,88.4 17.7,86.7 17.7,84.3 18.5,83.5 21.3,83.5 v21.4,83.6
  Bottom 0.203: IC102.7 21.05,83.95 v21.4,83.6
M_PGC1  (via drill 0.38)
  Top 0.203: v17.3,88.1 16.5,88.9 16.5,91.5 15.5,92.5 13.8,92.5 12.7,93.6 12.7,97.1 13.2,97.6 41.9,97.6 42.8,96.7 42.8,92.3 41,90.5 v40.9,90.5
  Bottom 0.203: IC102.15 17.45,87.95 v17.3,88.1 | PROGRAMMING.4 PROGRAMMING.3 40.85,90.5 v40.9,90.5
M_PGD1  (via drill 0.38)
  Top 0.203: v17.8,89.3 17,90.1 17,91.7 15.2,93.5 15.2,96.4 15.9,97.1 41.5,97.1 42.3,96.3 42.3,93.1 40.1,90.9 v40.1,89.2
  Bottom 0.203: IC102.16 18.65,88.45 v17.8,89.3 | PROGRAMMING.5 40.9,89.2 | PROGRAMMING.6 PROGRAMMING.5 | PROGRAMMING.5 v40.1,89.2
N$1
  Bottom 0.203: IC101.2 16.05,25.32 16.93,24.44 C105.2
N$2
  Bottom 0.203: IC101.1 14.47,24.44 C105.1
N$3
  Bottom 0.203: R106.1 C106.1 12.22,23.71 12.22,25.34 12.85,25.97 IC101.3
N$4
  Bottom 0.203: R108.1 11.13,27.92 IC101.6
N$5
  Bottom 0.203: IC100.2 16.05,10.72 16.28,10.48 16.28,8.95 C100.2
N$6
  Bottom 0.203: IC100.1 14.47,8.48 C100.1
N$7
  Bottom 0.203: IC100.3 12.85,11.37 11.84,10.36 11.84,8.47 C101.1 R100.1
N$8
  Bottom 0.203: IC100.6 10.75,13.32 R102.1
N$9
  Bottom 0.203: IC100.9 10.75,15.27 R103.1
N$10
  Bottom 0.203: R109.1 11.01,29.87 IC101.9
N$11
  Bottom 0.203: IC100.12 IC100.13 13.72,17.87 13.49,18.1 13.49,19.75 R105.1 15.09,21.35 15.09,22.1 15.35,22.35 19.04,22.35 R107.1
N$12
  Bottom 0.203: IC101.12 IC101.13 13.47,32.47 12.85,33.09 12.85,35.38 13.49,36.01 R111.1 14.38,36.03 14.38,36.65 14.83,37.1 18.54,37.1 R112.1
N$13
  Bottom 0.203: R125.1 20.91,72.5 U101.14
N$14
  Bottom 0.203: R123.1 11.23,71.51 U101.1
N$15
  Bottom 0.203: U100.14 20.91,52.18 R120.1
N$16
  Bottom 0.203: R115.1 U100.1
N$17
  Bottom 0.203: C120.1 R116.1 13.54,54.6 13.54,53.98 14.61,52.92 U100.6
N$18
  Bottom 0.203: U101.6 14.61,73.24 13.54,74.31 13.54,75.05 R124.1 C131.1
N$19
  Bottom 0.203: U101.9 16.54,72.98 18.25,74.7 C129.1 R128.1
N$20
  Bottom 0.203: U100.9 16.54,54.58 R117.1 C119.1
N$21
  Bottom 0.203: U100.5 13.95,52.56 12.9,53.6 8.33,53.6 7.83,54.11 7.83,55 8.6,55.78 R119.2 9.98,57.08 C121.1 R122.1
N$22
  Bottom 0.203: U100.8 15.9,57.08 15.19,57.8 15.18,57.78 R121.1 13.35,57.35 12.8,56.8 12.28,56.8 R118.2
N$23
  Bottom 0.203: U100.23 14.61,41.97 14.18,41.54 13.68,41.54 C114.1
N$24
  Bottom 0.203: U100.24 13.95,43.1 C114.2
N$25
  Bottom 0.254: R131.1 LED100.A
N$26
  Bottom 0.203: U101.5 13.95,73.14 13.29,73.8 8.84,73.8 8.59,74.05 8.59,76.7 C132.1 R130.1 R127.2
N$27
  Bottom 0.203: U100.20 16.54,44.26 17.22,43.57 C112.1
N$28
  Bottom 0.203: U100.22 15.24,43.03 C113.2
N$29
  Bottom 0.203: R112.2 20.65,37.01 C109.1 R110.2 IC101.15
N$30
  Bottom 0.203: U101.8 15.9,77.28 15.19,77.99 12.41,77.99 R129.1 | 12.16,77.73 R129.1 | R126.2 R129.1
N$31
  Bottom 0.203: IC101.18 19.73,31.17 19.6,31.3 19.6,34.35 R110.1
N$32
  Bottom 0.203: U101.23 14.61,62.29 14.3,61.99 13.68,61.99 C124.1
N$33
  Bottom 0.203: U101.24 13.95,63.55 C124.2
N$34
  Bottom 0.203: U101.20 16.54,64.58 17.1,64.02 17.1,63.52 C123.1
N$35
  Bottom 0.203: IC100.18 19.83,16.57 19.6,16.8 19.6,19.35 R104.1
N$36
  Bottom 0.203: C125.2 15.24,63.6 U101.22
N$37
  Bottom 0.203: R107.2 20.34,21.21 C104.1 | 20.34,21.19 C104.1 | IC100.15 20.64,19.61 R104.2 C104.1
N$38
  Bottom 0.203: R101.1 POWER_ON.A
N$39
  Bottom 0.203: IC102.56 25.95,75.7 C128.1
OC1
  Bottom 0.203: IC102.33 32.4,88.45 32.65,88.45 36.25,88.45 37.9,86.8 37.9,79.4 35.1,76.6 35.1,19.3 24,8.2 17.2,8.2 16.3,7.3 13.4,7.3 12.5,6.4 12.5,5.16 SERVO_102.1
OC2
  Bottom 0.203: SERVO_101.1 21,5.16 21,6.7 22,7.7 24.2,7.7 35.6,19.1 35.6,76.4 38.4,79.2 38.4,87.1 36.4,89.1 30.75,89.1 IC102.32
OC3
  Bottom 0.203: SERVO_100.1 29.6,5.16 29.6,12.4 36.1,18.9 36.1,76.2 37.7,77.8 37.9,78 38.9,79 38.9,87.3 36.6,89.6 31.9,89.6 30.1,91.4 29,91.4 28.95,91.35 IC102.31
PH_VM
  pour Bottom: 50.75,48.19 48.53,48.19 48.53,48.82 47.9,49.46 47.9,56.12 43.45,59.3 43.45,65.65 50.75,65.65
S1-AOUT1
  Bottom 0.203: STEP1.4 6.17,73.29 12.78,73.29 13.29,72.78 U101.4
S1-AOUT2  (via drill 0.38)
  Top 0.203: STEP1.1 10.62,64.65 v12.14,63.13
  Bottom 0.203: U101.25 13.29,64.27 v12.14,63.13
S1-BOUT1
  Bottom 0.203: STEP1.3 12.02,69.73 12.4,70.11 17.48,70.11 17.86,70.5 U101.11
S1-BOUT2
  Bottom 0.203: U101.18 17.86,66.43 17.48,66.81 12.4,66.81 11.89,67.32 5.29,67.32 STEP1.2
S1-DIR  (via drill 0.38)
  Top 0.203: v10.62,72.53 11.75,71.4 v21.1,71.4
  Bottom 0.203: v10.62,72.53 12.52,72.53 12.65,72.4 U101.3 | v21.1,71.4 21.8,72.1 21.8,77.6 21.95,77.75 IC102.64
S1-ENABLEN  (via drill 0.38)
  Top 0.203: v10.8,62.9 11.3,62.4 12.6,62.4 15.6,65.4 v22.3,65.4
  Bottom 0.203: U101.26 12.65,64.4 12.14,63.89 11.76,63.89 10.8,62.93 v10.8,62.9 | v22.3,65.4 25.5,65.4 26.05,65.95 26.45,66.35 26.6,66.5 26.6,75.9 26.45,76.05 IC102.55
S1-HOME  (via drill 0.38)
  Top 0.203: v10.49,70.5 21.5,70.5 v22.1,71.2
  Bottom 0.203: v10.49,70.5 10.75,70.24 11.76,70.24 11.99,70.47 U101.2 | IC102.63 22.45,77.55 22.3,77.4 22.3,71.4 v22.1,71.2
S1-STEP  (via drill 0.38)
  Top 0.203: v18.38,63.5 v18.37,63.51 19.29,63.51 19.3,63.5 v22.9,63.5
  Bottom 0.203: U101.19 17.2,64.68 v18.37,63.51 | v22.9,63.5 26.4,63.5 27.6,64.7 27.6,76.3 27.45,76.45 IC102.53
S2-AOUT1
  Bottom 0.203: U100.4 13.29,52.33 12.65,52.97 6.05,52.97 STEP2.4
S2-AOUT2  (via drill 0.38)
  Top 0.203: STEP2.1 10.37,44.46 v12.52,42.3
  Bottom 0.203: v12.52,42.3 12.52,43.19 13.29,43.95 U100.25
S2-BOUT1
  Bottom 0.203: U100.11 17.86,50.17 17.6,49.92 12.52,49.92 11.76,49.16 5.54,49.16 STEP2.3
S2-BOUT2
  Bottom 0.203: U100.18 17.86,46.24 17.6,46.49 12.4,46.49 11.76,47.13 5.29,47.13 STEP2.2
S2-DIR  (via drill 0.38)
  Top 0.203: v21,50.8 11.64,50.8 v10.49,51.95
  Bottom 0.203: U100.3 12.65,51.95 12.4,52.21 10.75,52.21 v10.49,51.95 | v21,50.8 22.2,52 22.2,63.8 23.2,64.8 25.9,64.8 27.1,66 27.1,76.1 26.95,76.25 IC102.54
S2-ENABLEN  (via drill 0.38)
  Top 0.203: v11.1,42 11.5,41.6 12.9,41.6 16.55,45.16 16.98,45.6 25,45.6 v25.4,46
  Bottom 0.203: U100.26 12.65,44.08 11.1,42.53 v11.1,42 | v25.4,46 28.6,49.2 28.6,76.7 28.45,76.85 IC102.51
S2-HOME  (via drill 0.38)
  Top 0.203: v10.37,49.92 10.49,49.8 v21,49.8
  Bottom 0.203: v10.37,49.92 11.69,49.92 11.99,50.23 U100.2 12.02,51.04 | v21,49.8 21.3,49.8 22.8,51.3 22.8,58.8 28.1,64.1 28.1,76.5 27.95,76.65 IC102.52
S2-STEP  (via drill 0.38)
  Top 0.203: v25.3,43.7 v18.37,43.7
  Bottom 0.203: U100.19 17.2,44.36 17.86,43.7 v18.37,43.7 | v25.3,43.7 28.5,46.9 28.95,47.35 29.1,47.5 29.1,76.9 28.95,77.05 IC102.50
S-SRN  (via drill 0.38)
  Top 0.203: v25.4,47.1 25.2,47.1 24.1,48.2 24.1,66.5 23.2,67.4 v22.7,67.4
  Bottom 0.203: U100.16 19.15,46.14 20.12,47.1 v25.4,47.1 | U101.16 19.15,66.46 20.1,67.4 v22.7,67.4 23.5,67.4 24.3,68.2 24.3,76.3 24.45,76.45 IC102.59
SCL  (via drill 0.38)
  Top 0.203: v17.2,80.4 17.2,80.5 16.5,81.2 16.5,86.5 15,88 15,90.5 14.5,91 10.7,91 9.2,92.5 9.2,97 11.3,99.1 42.6,99.1 48.7,93 48.7,88.8 50.1,87.4 SCL.TP
  Bottom 0.203: IC102.2 18.25,81.45 v17.2,80.4
SDA  (via drill 0.38)
  Top 0.203: v17.2,81.5 17.2,86.5 15.5,88.2 15.5,90.7 14.7,91.5 10.9,91.5 9.7,92.7 9.7,96.8 11.5,98.6 42.4,98.6 48.2,92.8 48.2,88.5 SDA.TP
  Bottom 0.203: IC102.3 17.65,81.95 v17.2,81.5
USM0  (via drill 0.38)
  Top 0.203: v22.5,70.4 22.6,70.5 24,70.5 25.9,68.6 v25.9,50.9
  Bottom 0.203: U100.13 19.15,50.15 20.2,49.1 24.1,49.1 v25.9,50.9 | U101.13 19.15,70.47 19.42,70.2 22.3,70.2 v22.5,70.4 22.8,70.7 22.8,77.1 22.95,77.25 IC102.62
USM1  (via drill 0.38)
  Top 0.203: v22.7,69.2 23.6,69.2 25.1,67.7 25.1,50.2 v25.7,49.6
  Bottom 0.203: U100.12 18.49,50.05 19.94,48.6 24.7,48.6 v25.7,49.6 | U101.12 18.49,70.37 19.66,69.2 v22.7,69.2 23.3,69.8 23.3,76.8 23.45,76.95 IC102.61
VCC  (via drill 0.38, 1)
  Top 0.203: PWR_IN(2).2 49.7,12.6 v50.8,13.7
  Bottom 0.203: R101.2 v50.8,13.7
  Bottom 0.254: U$101.7 46.62,52.31 v46.31,52.63
  pour Bottom: 45.35,51.68 46.94,51.68 46.94,55.17 44.09,55.17 44.09,52.95
  pour Top (isolate 0.254): 43.3,10.7 49,10.7 49,53.59 45.95,53.59 45.95,16.7 43.3,14.2
VSNS_VM
  Bottom 0.254: R113.1 R114.2 44.09,43.58 U$101.4

## Text on the board
tPlace: Joshua Stevens